# Altium PCB analogtestboard3.PCBDOC (part 2 of 3)
Units mil, origin at the board's own origin, x right, y up, seen from the top; angles counter-clockwise.
Board outline 10000 x 10000 mil, 4 copper layers (Top Layer, Internal Plane 1, Internal Plane 2, Bottom Layer); 448 components, 227 nets, 1474 pads, 451 vias.
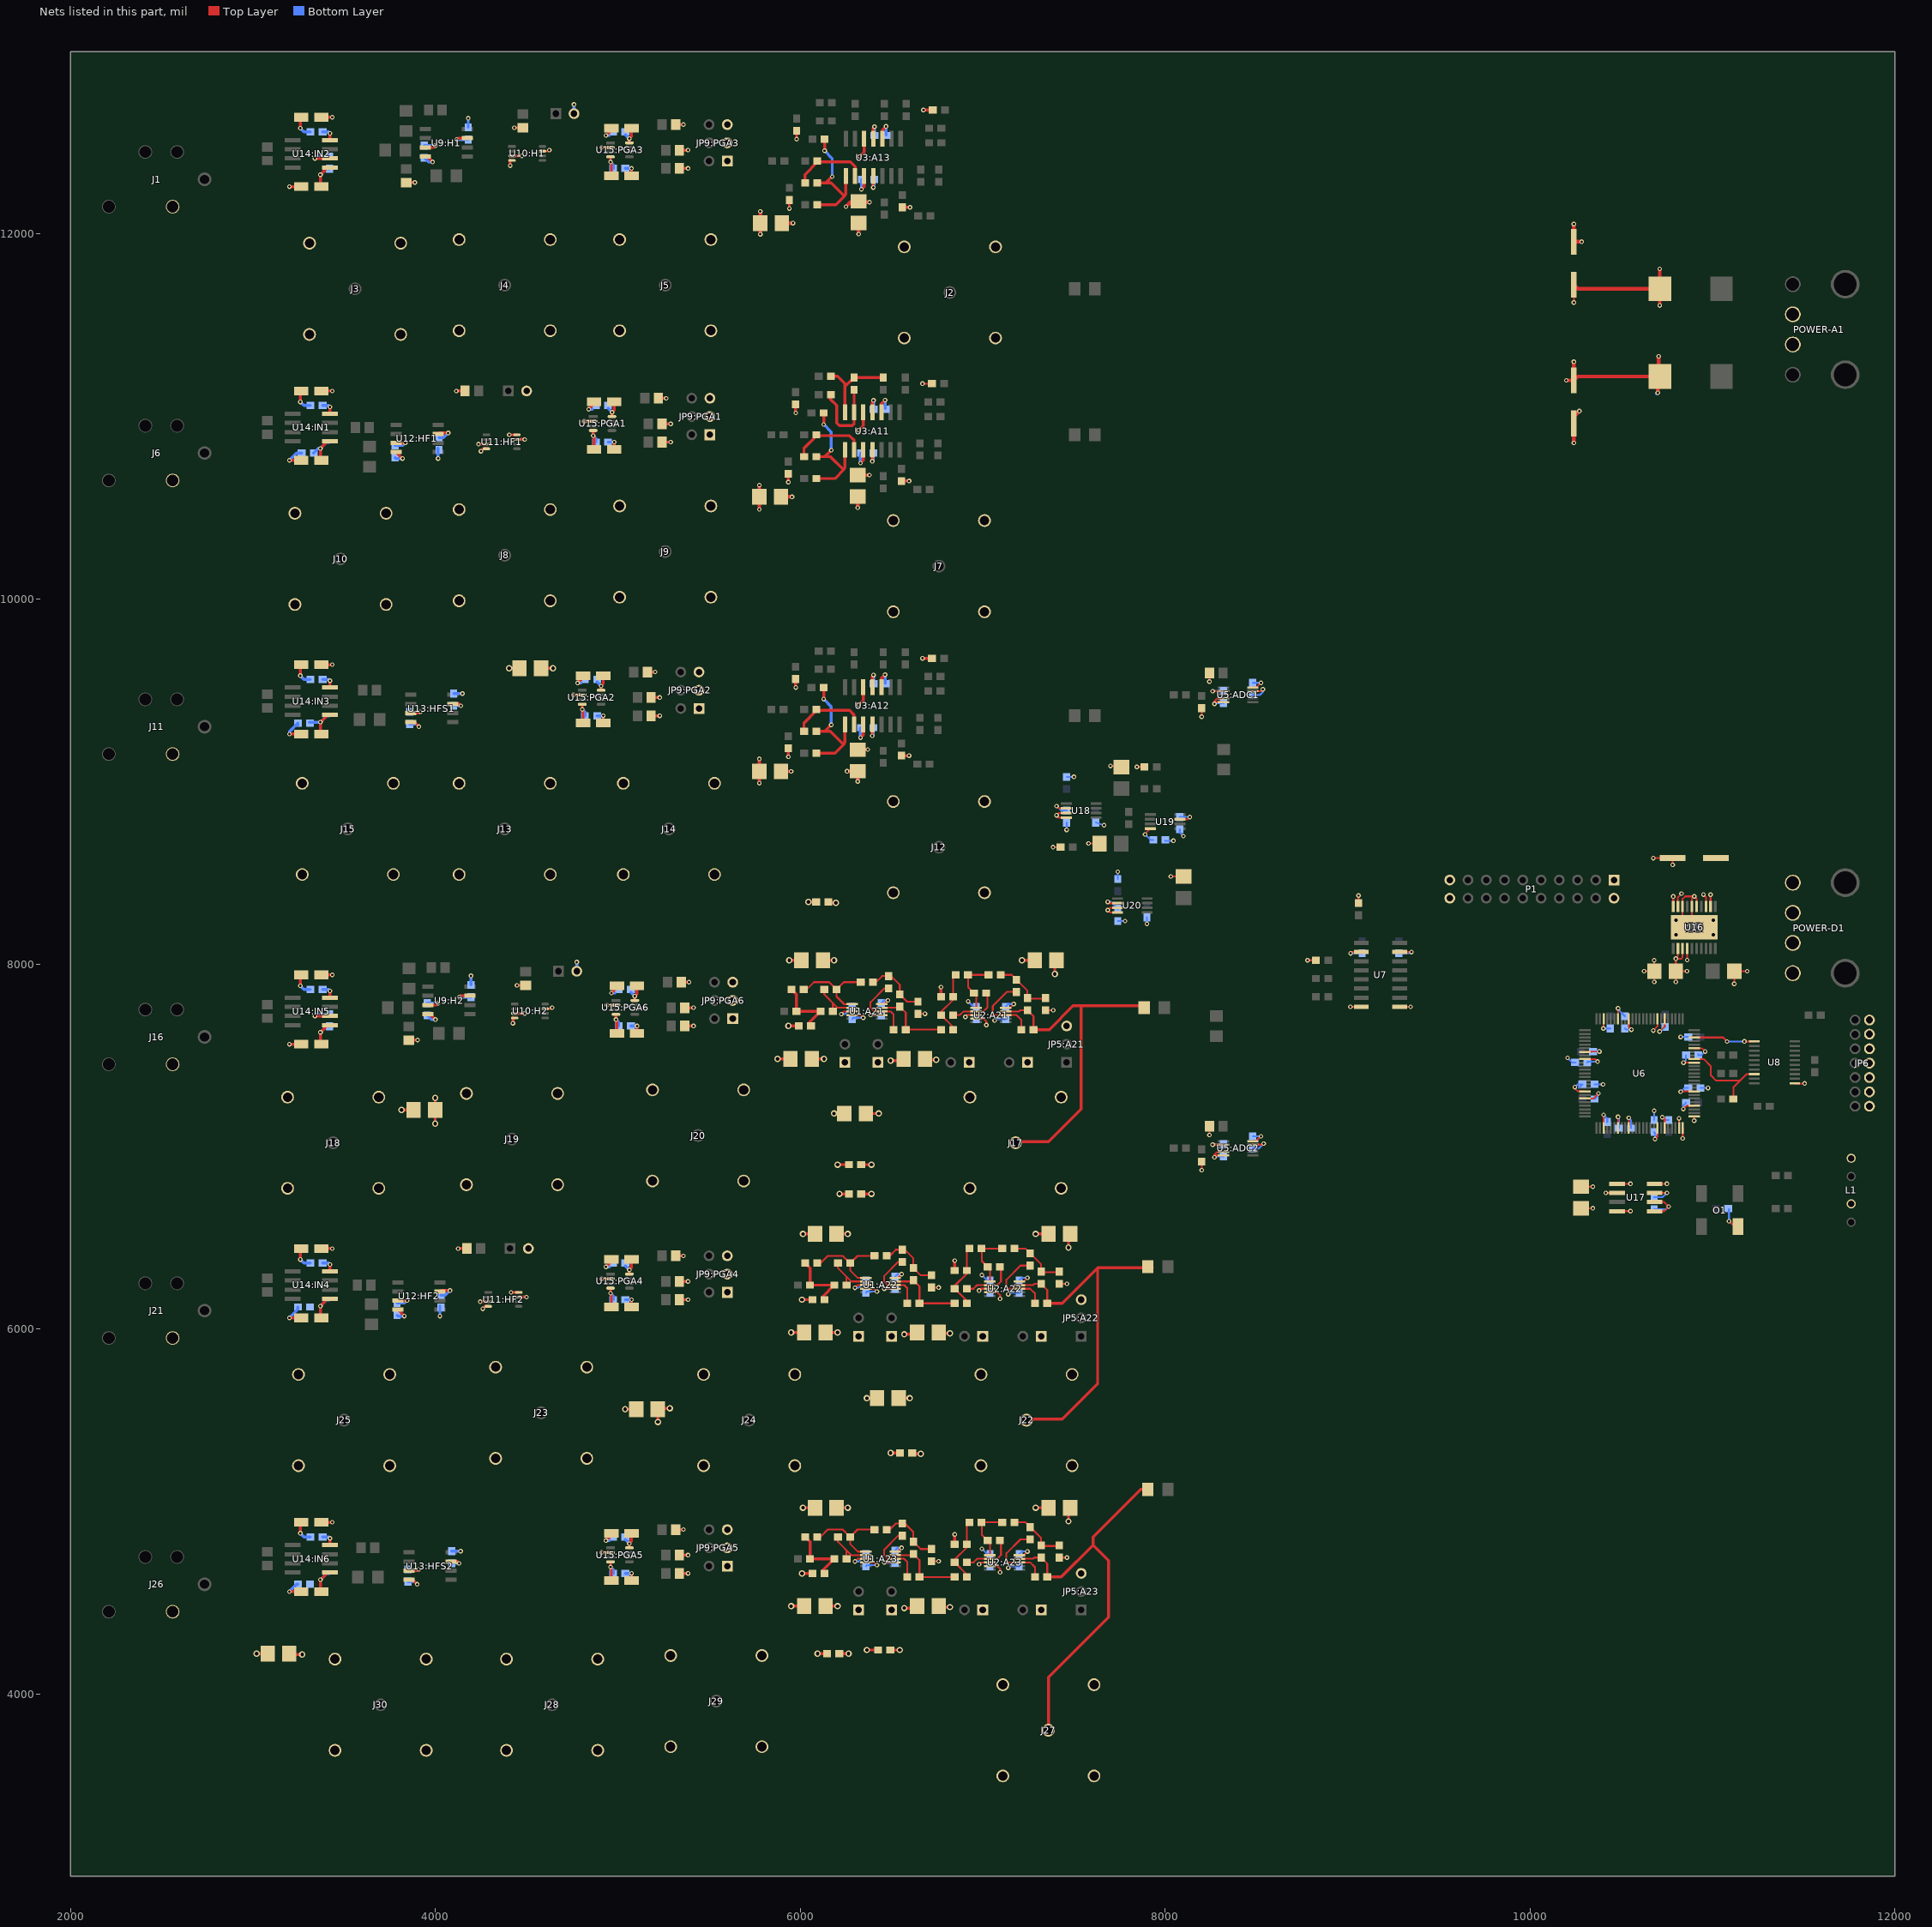
[diagram p4: the nets of this part, all layers, seen from the top]

## Footprints (in the part's own frame and the unit in brackets; to place one, negate y for a bottom-side part, rotate by r counter-clockwise, add the part's x,y. Pads: shape width x height; smd on the part's side, far side on the other; paste and mask are expansions set on the pad) (continued)
"Xilinx TQ100" [mm] "QFP; 100 Leads; Body 14 x 14 mm; Pitch 0.5 mm"
  rect 1.6x0.3 smd: 1(-7.6,6) 2(-7.6,5.5) 3(-7.6,5) 4(-7.6,4.5) 5(-7.6,4) 6(-7.6,3.5) 7(-7.6,3) 8(-7.6,2.5) 9(-7.6,2) 10(-7.6,1.5) 11(-7.6,1) 12(-7.6,0.5) 13(-7.6,0) 14(-7.6,-0.5) 15(-7.6,-1) 16(-7.6,-1.5) 17(-7.6,-2) 18(-7.6,-2.5) 19(-7.6,-3) 20(-7.6,-3.5) 21(-7.6,-4) 22(-7.6,-4.5) 23(-7.6,-5) 24(-7.6,-5.5) 25(-7.6,-6) 51(7.6,-6) 52(7.6,-5.5) 53(7.6,-5) 54(7.6,-4.5) 55(7.6,-4) 56(7.6,-3.5) 57(7.6,-3) 58(7.6,-2.5) 59(7.6,-2) 60(7.6,-1.5) 61(7.6,-1) 62(7.6,-0.5) 63(7.6,0) 64(7.6,0.5) 65(7.6,1) 66(7.6,1.5) 67(7.6,2) 68(7.6,2.5) 69(7.6,3) 70(7.6,3.5) 71(7.6,4) 72(7.6,4.5) 73(7.6,5) 74(7.6,5.5) 75(7.6,6)
  rect 0.3x1.6 smd: 26(-6,-7.6) 27(-5.5,-7.6) 28(-5,-7.6) 29(-4.5,-7.6) 30(-4,-7.6) 31(-3.5,-7.6) 32(-3,-7.6) 33(-2.5,-7.6) 34(-2,-7.6) 35(-1.5,-7.6) 36(-1,-7.6) 37(-0.5,-7.6) 38(0,-7.6) 39(0.5,-7.6) 40(1,-7.6) 41(1.5,-7.6) 42(2,-7.6) 43(2.5,-7.6) 44(3,-7.6) 45(3.5,-7.6) 46(4,-7.6) 47(4.5,-7.6) 48(5,-7.6) 49(5.5,-7.6) 50(6,-7.6) 76(6,7.6) 77(5.5,7.6) 78(5,7.6) 79(4.5,7.6) 80(4,7.6) 81(3.5,7.6) 82(3,7.6) 83(2.5,7.6) 84(2,7.6) 85(1.5,7.6) 86(1,7.6) 87(0.5,7.6) 88(0,7.6) 89(-0.5,7.6) 90(-1,7.6) 91(-1.5,7.6) 92(-2,7.6) 93(-2.5,7.6) 94(-3,7.6) 95(-3.5,7.6) 96(-4,7.6) 97(-4.5,7.6) 98(-5,7.6) 99(-5.5,7.6) 100(-6,7.6)
  silkscreen extent -7.72,-6.4 6.4,6.82

## Part data
C1:A21 C1:A22 C1:A23 C2:A21 C2:A22 C2:A23 C3:A21 C3:A22 C3:A23 C4:A21 C4:A22 C4:A23 C5:A21 C5:A22 C5:A23 C6:A21 C6:A22 C6:A23 C7:A21 C7:A22 C7:A23 C8:A21 C8:A22 C8:A23 C11:A21 C11:A22 C11:A23 C12:A21 C12:A22 C12:A23 C15:A21 C15:A22 C15:A23 C16:A21 C16:A22 C16:A23 C17:A11 C17:A12 C17:A13 C18:A11 C18:A12 C18:A13 C19:A11 C19:A12 C19:A13 C20:A11 C20:A12 C20:A13 C21:A11 C21:A12 C21:A13 C22:A11 C22:A12 C22:A13 C23:A11 C23:A12 C23:A13 C24:A11 C24:A12 C24:A13 C27:A11 C27:A12 C27:A13 C28:A11 C28:A12 C28:A13 C31:A11 C31:A12 C31:A13 C32:A11 C32:A12 C32:A13 C34:ADC1 C34:ADC2 C36:ADC1 C36:ADC2 C37 C38 C39 C40 C41 C42 C43 C44 C45 C46 C47 C48 C49 C50 C51 C52 C53 C54 C55:H1 C55:H2 C56:H1 C56:H2 C57:H1 C57:H2 C58:H1 C58:H2 C59:H1 C59:H2 C60:HF1 C60:HF2 C61:HF1 C61:HF2 C62:HF1 C62:HF2 C63:HFS1 C63:HFS2 C64:HFS1 C64:HFS2 C65:HFS1 C65:HFS2 C67:IN1 C67:IN2 C67:IN3 C67:IN4 C67:IN5 C67:IN6 C69:IN1 C69:IN2 C69:IN3 C69:IN4 C69:IN5 C69:IN6 C70:PGA1 C70:PGA2 C70:PGA3 C70:PGA4 C70:PGA5 C70:PGA6 C72:PGA1 C72:PGA2 C72:PGA3 C72:PGA4 C72:PGA5 C72:PGA6 C76 C82 C83 C84 C85 C86 C88 C90 C91 C92: "Capacitor"
C9:A21 C9:A22 C9:A23 C10:A21 C10:A22 C10:A23 C13:A21 C13:A22 C13:A23 C14:A21 C14:A22 C14:A23 C25:A11 C25:A12 C25:A13 C26:A11 C26:A12 C26:A13 C29:A11 C29:A12 C29:A13 C30:A11 C30:A12 C30:A13 C81 C87 C89: "Polarized Capacitor (Radial)"
C33:ADC1 C33:ADC2 C35:ADC1 C35:ADC2: library part Cap, "Capacitor"
C66:IN1 C66:IN2 C66:IN3 C66:IN4 C66:IN5 C66:IN6 C68:IN1 C68:IN2 C68:IN3 C68:IN4 C68:IN5 C68:IN6: "Polarized Capacitor (Surface Mount)"
C71:PGA1 C71:PGA2 C71:PGA3 C71:PGA4 C71:PGA5 C71:PGA6 C73:PGA1 C73:PGA2 C73:PGA3 C73:PGA4 C73:PGA5 C73:PGA6 C74 C77: library part Cap2, "Capacitor"
C75 C78: library part "Cap Pol1", "Polarized Capacitor (Radial)"
C79 C80: library part "Cap Pol3", "Polarized Capacitor (Surface Mount)"
J1 J6 J11 J16 J21 J26: library part XLR, "XLR balanced connector, standard"
J2 J3 J4 J5 J7 J8 J9 J10 J12 J13 J14 J15 J17 J18 J19 J20 J22 J23 J24 J25 J27 J28 J29 J30: library part VERTBNC, "Vertical BNC with correct grounding pin behavior"
JP1:A21 JP1:A22 JP1:A23 JP2:A21 JP2:A22 JP2:A23 JP3:A21 JP3:A22 JP3:A23 JP4:A21 JP4:A22 JP4:A23 JP7:H1 JP7:H2 JP8:HF1 JP8:HF2: "Header, 2-Pin"
JP5:A21 JP5:A22 JP5:A23: "Header, 3-Pin"
JP6: "Header, 7-Pin, Dual row"
JP9:PGA1 JP9:PGA2 JP9:PGA3 JP9:PGA4 JP9:PGA5 JP9:PGA6: "Header, 3-Pin, Dual row"
L2 L3: library part Inductor, "Inductor"
O1: library part SG-636PCE, "Epson CMOS/TTL Oscillator"
P1: "Header, 10-Pin, Dual row"
POWER-A1 POWER-D1: library part "Header 4", "Header, 4-Pin"
R1:A21 R1:A22 R1:A23 R2:A21 R2:A22 R2:A23 R3:A21 R3:A22 R3:A23 R4:A21 R4:A22 R4:A23 R5:A21 R5:A22 R5:A23 R6:A21 R6:A22 R6:A23 R7:A21 R7:A22 R7:A23 R8:A21 R8:A22 R8:A23 R9:A21 R9:A22 R9:A23 R10:A21 R10:A22 R10:A23 R11:A21 R11:A22 R11:A23 R12:A21 R12:A22 R12:A23 R13:A11 R13:A12 R13:A13 R14:A11 R14:A12 R14:A13 R15:A11 R15:A12 R15:A13 R16:A11 R16:A12 R16:A13 R17:A11 R17:A12 R17:A13 R18:A11 R18:A12 R18:A13 R19:A11 R19:A12 R19:A13 R20:A11 R20:A12 R20:A13 R21:A11 R21:A12 R21:A13 R22:A11 R22:A12 R22:A13 R23:A11 R23:A12 R23:A13 R24:A11 R24:A12 R24:A13 R25:ADC1 R25:ADC2 R26 R27 R28 R29 R30 R31 R36 R37 R38:H1 R38:H2 R39:H1 R39:H2 R40:H1 R40:H2 R41:HF1 R41:HF2 R42:HF1 R42:HF2 R43:HFS1 R43:HFS2 R53:PGA1 R53:PGA2 R53:PGA3 R53:PGA4 R53:PGA5 R53:PGA6 R54:PGA1 R54:PGA2 R54:PGA3 R54:PGA4 R54:PGA5 R54:PGA6 R55:PGA1 R55:PGA2 R55:PGA3 R55:PGA4 R55:PGA5 R55:PGA6: "Resistor"
R32 R33 R34 R35 R45 R46 R47 R48 R49 R50 R51 R52 R56 R57 R58: library part Res1, "Resistor"
R44:IN1 R44:IN2 R44:IN3 R44:IN4 R44:IN5 R44:IN6: library part Res1, "RR1220P-4990-D-M"
U1:A21 U1:A22 U1:A23 U2:A21 U2:A22 U2:A23: "Analog Devices Low Distortion, High Speed RRIO OA"
U3:A11 U3:A12 U3:A13: library part AD8513ARU, "low-noise JFET quad OA"
U5:ADC1 U5:ADC2: library part AD7685, "AD 16-bit 250 kSPS ADC"
U6: library part XC3S50-4VQ100C, "Xilinx Spartan-3 VQ100"
U7: "High speed digital coupler"
U8: "Xilinx Platform Flash"
U9:H1 U9:H2 U12:HF1 U12:HF2 U13:HFS1 U13:HFS2: "AD Precision Low Noise, Low Input Bias Current Operational Amplifier"
U10:H1 U10:H2 U11:HF1 U11:HF2: library part ADG619, "Low RON SPDT Switch"
U14:IN1 U14:IN2 U14:IN3 U14:IN4 U14:IN5 U14:IN6: library part AD8221, "AD8221 Precision Instrumentation Amplifier"
U15:PGA1 U15:PGA2 U15:PGA3 U15:PGA4 U15:PGA5 U15:PGA6: library part LTC6910-2, "LTI Digitally Controlled Programmabe Gain Amp"
U16: "TI dual-output low dropout voltage regulators"
U17: "Fast-transient-response 500 mA low-dropout voltage regulator"
U18 U20: library part MAX6126A21, "Ultra-High-Precision, Ultra-Low-Noise, Series Voltage Reference"
U19: library part OP1177, "Precision Low Noise, Low Input Bias Current Operational Amplifier"

## Via types
v1: diameter 25, hole 13.5, Top Layer to Bottom Layer, 398 vias
v2: diameter 35, hole 20, Top Layer to Bottom Layer, 53 vias

## Nets (pads, with @x,y where several pads share a name; then routed paths per layer and width w, separated by ;. In a path a pad name is that pad's centre, name@x,y a point inside that pad or via, vN(x,y) a via of type N, cw(c..) or ccw(c..) an arc to the next point about the centre after c; other vN are vias at no path point)
+1.2VCC: C48.1 C49.1 C50.1 C51.1 C78.1 U6.18 U6.45 U6.69 U6.93 U16.12 U16.13 U16.14 | length 875.7
  Top Layer w10: v1(10245,7325) 10245,7320 10263.43,7301.57 U6.93@10300.79,7301.57 ; U6.69@10481.89,7699.21 v1(10481.89,7756.89) ; v1(10685,7040) 10698.43,7053.43 U6.18@10698.43,7100.79 ; v1(10799.06,7900.94) v1(10799.06,8029.06) 10829.06,8029.06 10835.8,8035.8 U16.13@10835.8,8085 ; C78.1@10799.06,7960 v1(10860,7960) ; 10810.2,8040.2 U16.12@10810.2,8085 ; v1(10861.4,8021.4) U16.14@10861.4,8085 ; U6.45@10899.21,7537.8 10942.2,7537.8 v1(10960,7520)
  Bottom Layer w10: v1(10245,7325) 10260,7340 C48.1@10286.54,7340 10266.54,7320 ; v1(10481.89,7756.89) 10488.78,7750 10488.78,7744.68 C51.1@10520,7713.46 ; C50.1@10680,7078.29 10685,7073.29 v1(10685,7040) ; C49.1@10921.71,7506.71 C49.1@10921.71,7500 10940,7500 v1(10960,7520)
+2.5VCC: C52.1 C53.1 C54.1 C77.1 U6.7 U6.33 U6.58 U6.84 U17.5 U17.6 | length 653.9
  Top Layer w10: C77.1@10280,6779.06 v1(10344.06,6779.06) ; U6.84@10300.79,7478.74 10356.26,7478.74 v1(10370,7465) ; v1(10415,6745) U17.6@10477.64,6745 ; U17.5@10477.64,6795 v1(10550,6795) ; U6.7@10481.89,7100.79 v1(10481.89,7161.89) ; v1(10675,7635) 10698.43,7658.43 U6.58@10698.43,7699.21 ; v1@10826.57,7301.57 U6.33@10899.21,7301.57
  Bottom Layer w10: C52.1@10313.46,7460 10318.46,7465 v1(10370,7465) ; v1(10481.89,7161.89) 10486.54,7157.24 C53.1@10486.54,7100 ; v1(10825,7300) 10845,7320 C54.1@10866.54,7320
+5VCC: C74.1 C76.1 POWER-D1.4 U16.2 U16.3 U16.9 U16.10 U17.3 U17.4 | length 482.8
  Top Layer w10: U17.3@10682.36,6745 v1(10750,6745) ; U17.4@10682.36,6795 v1(10750,6795) ; U16.10@10784.6,8315 v1(10784.6,8369.6) ; U16.9@10810.2,8315 10810.2,8365.2 v1(10830,8385) ; v1(10950,8380) 10963.8,8366.2 U16.3@10963.8,8315 ; U16.2@10989.4,8315 v1(10989.4,8379.4)
  Bottom Layer w10: C76.1@10680,6721.71 10726.71,6721.71 v1(10750,6745)
AGND: C5:A21.1 C5:A22.1 C5:A23.1 C6:A21.1 C6:A22.1 C6:A23.1 C7:A21.1 C7:A22.1 C7:A23.1 C8:A21.1 C8:A22.1 C8:A23.1 C9:A21.2 C9:A22.2 C9:A23.2 C10:A21.2 C10:A22.2 C10:A23.2 C11:A21.1 C11:A22.1 C11:A23.1 C12:A21.1 C12:A22.1 C12:A23.1 C13:A21.1 C13:A22.1 C13:A23.1 C14:A21.1 C14:A22.1 C14:A23.1 C15:A21.2 C15:A22.2 C15:A23.2 C16:A21.2 C16:A22.2 C16:A23.2 C21:A11.1 C21:A12.1 C21:A13.1 C22:A11.1 C22:A12.1 C22:A13.1 C23:A11.1 C23:A12.1 C23:A13.1 C24:A11.1 C24:A12.1 C24:A13.1 C25:A11.2 C25:A12.2 C25:A13.2 C26:A11.2 C26:A12.2 C26:A13.2 C27:A11.1 C27:A12.1 C27:A13.1 C28:A11.1 C28:A12.1 C28:A13.1 C29:A11.1 C29:A12.1 C29:A13.1 C30:A11.1 C30:A12.1 C30:A13.1 C31:A11.2 C31:A12.2 C31:A13.2 C32:A11.2 C32:A12.2 C32:A13.2 C33:ADC1.1 C33:ADC2.1 C34:ADC1.2 C34:ADC2.2 C35:ADC1.1 C35:ADC2.1 C36:ADC1.1 C36:ADC2.1 C37.1 C56:H1.2 C56:H2.2 C59:H1.2 C59:H2.2 C61:HF1.1 C61:HF2.1 C62:HF1.1 C62:HF2.1 C64:HFS1.1 C64:HFS2.1 C65:HFS1.1 C65:HFS2.1 C66:IN1.2 C66:IN2.2 C66:IN3.2 C66:IN4.2 C66:IN5.2 C66:IN6.2 C67:IN1.2 C67:IN2.2 C67:IN3.2 C67:IN4.2 C67:IN5.2 C67:IN6.2 C68:IN1.1 C68:IN2.1 C68:IN3.1 C68:IN4.1 C68:IN5.1 C68:IN6.1 C69:IN1.2 C69:IN2.2 C69:IN3.2 C69:IN4.2 C69:IN5.2 C69:IN6.2 C70:PGA1.2 C70:PGA2.2 C70:PGA3.2 C70:PGA4.2 C70:PGA5.2 C70:PGA6.2 C71:PGA1.2 C71:PGA2.2 C71:PGA3.2 C71:PGA4.2 C71:PGA5.2 C71:PGA6.2 C72:PGA1.1 C72:PGA2.1 C72:PGA3.1 C72:PGA4.1 C72:PGA5.1 C72:PGA6.1 C73:PGA1.1 C73:PGA2.1 C73:PGA3.1 C73:PGA4.1 C73:PGA5.1 C73:PGA6.1 C79.2 C80.1 C81.2 C82.2 C83.2 C84.1 C85.2 C86.1 C87.2 C88.2 C89.2 C90.2 C91.2 C92.2 J1.1 J2.2 J2.3 J2.4 J2.5 J3.2 J3.3 J3.4 J3.5 J4.2 J4.3 J4.4 J4.5 J5.2 J5.3 J5.4 J5.5 J6.1 J7.2 J7.3 J7.4 J7.5 J8.2 J8.3 J8.4 J8.5 J9.2 J9.3 J9.4 J9.5 J10.2 J10.3 J10.4 J10.5 J11.1 J12.2 J12.3 J12.4 J12.5 J13.2 J13.3 J13.4 J13.5 J14.2 J14.3 J14.4 J14.5 J15.2 J15.3 J15.4 J15.5 J16.1 J17.2 J17.3 J17.4 J17.5 J18.2 J18.3 J18.4 J18.5 J19.2 J19.3 J19.4 J19.5 J20.2 J20.3 J20.4 J20.5 J21.1 J22.2 J22.3 J22.4 J22.5 J23.2 J23.3 J23.4 J23.5 J24.2 J24.3 J24.4 J24.5 J25.2 J25.3 J25.4 J25.5 J26.1 J27.2 J27.3 J27.4 J27.5 J28.2 J28.3 J28.4 J28.5 J29.2 J29.3 J29.4 J29.5 J30.2 J30.3 J30.4 J30.5 JP5:A21.3 JP5:A22.3 JP5:A23.3 JP9:PGA1.1 JP9:PGA1.3 JP9:PGA1.5 JP9:PGA2.1 JP9:PGA2.3 JP9:PGA2.5 JP9:PGA3.1 JP9:PGA3.3 JP9:PGA3.5 JP9:PGA4.1 JP9:PGA4.3 JP9:PGA4.5 JP9:PGA5.1 JP9:PGA5.3 JP9:PGA5.5 JP9:PGA6.1 JP9:PGA6.3 JP9:PGA6.5 POWER-A1.2 POWER-A1.3 R27.1 R39:H1.1 R39:H2.1 R40:H1.1 R40:H2.1 R42:HF1.1 R42:HF2.1 R58.1 U1:A21.3 U1:A21.7 U1:A22.3 U1:A22.7 U1:A23.3 U1:A23.7 U2:A21.3 U2:A22.3 U2:A23.3 U3:A11.3 U3:A11.10 U3:A11.12 U3:A12.3 U3:A12.10 U3:A12.12 U3:A13.3 U3:A13.10 U3:A13.12 U5:ADC1.4 U5:ADC1.5 U5:ADC1.9 U5:ADC2.4 U5:ADC2.5 U5:ADC2.9 U7.2 U7.8 U9:H1.3 U9:H2.3 U10:H1.3 U10:H2.3 U11:HF1.3 U11:HF1.8 U11:HF2.3 U11:HF2.8 U12:HF1.3 U12:HF2.3 U13:HFS1.3 U13:HFS2.3 U14:IN2.6 U14:IN5.6 U15:PGA1.2 U15:PGA2.2 U15:PGA3.2 U15:PGA4.2 U15:PGA5.2 U15:PGA6.2 U18.3 U18.4 U20.3 U20.4 | length 12133.9
  Top Layer w10: v1(6225,7725) 6240,7740 U1:A21.3@6284.29,7740 ; v1(6300,4725) 6315,4740 U1:A23.3@6359.29,4740 ; v1(6300,6225) 6315,6240 U1:A22.3@6359.29,6240 ; v1(6385.31,7720.31) U1:A21.7@6445.71,7720.31 ; v1(6460.31,4720.31) U1:A23.7@6520.71,4720.31 ; v1(6460.31,6220.31) U1:A22.7@6520.71,6220.31 ; C6:A21.1@6645,7726.54 v1(6683.46,7726.54) ; v1(6670,11180) C23:A11.1@6721.54,11180 ; C6:A23.1@6720,4726.54 v1(6758.46,4726.54) ; C6:A22.1@6720,6226.54 v1(6758.46,6226.54) ; v1(6905,7710) 6915,7720 U2:A21.3@6964.29,7720 ; v1(6980,4710) 6990,4720 U2:A23.3@7039.29,4720 ; v1(6980,6210) 6990,6220 U2:A22.3@7039.29,6220 ; C8:A21.1@7345,7746.54 v1(7386.54,7746.54) ; v1(7385,8640) C88.2@7426.54,8640 ; C8:A23.1@7420,4746.54 v1(7461.54,4746.54) ; C8:A22.1@7420,6246.54 v1(7461.54,6246.54) ; U18.4@7458.31,8801.61 7418.39,8801.61 v1(7405,8815) 7417.2,8827.2 U18.3@7458.31,8827.2 ; v1(7580,8660) C87.2@7640.94,8660 ; v1(7700,9085) C81.2@7760,9085 ; U20.4@7738.31,8281.61 7698.39,8281.61 v1(7685,8295) 7697.2,8307.2 U20.3@7738.31,8307.2 ; v1(7845,9080) R58.1@7886.54,9080 ; v1(8030.94,8479.06) C89.2@8100,8479.06 ; v1(8200,6870) C36:ADC2.1@8200,6916.54 ; v1(8200,9355) C36:ADC1.1@8200,9401.54 ; v1(8242.6,7062.4) C33:ADC2.1@8242.6,7110 ; v1(8242.6,9547.4) C33:ADC1.1@8242.6,9595 ; v1(8270,6940) 8270,6955 8285.31,6970.31 U5:ADC2.4@8319.29,6970.31 ; v1(8270,9425) 8270,9440 8285.31,9455.31 U5:ADC1.4@8319.29,9455.31 ; v1@8270.63,6950.63 U5:ADC2.5@8319.29,6950.63 ; v1@8270.63,9435.63 U5:ADC1.5@8319.29,9435.63 ; U5:ADC2.9@8480.71,7009.68 8534.68,7009.68 v1(8540,7015) ; U5:ADC1.9@8480.71,9494.68 8524.68,9494.68 v1(8535,9505) ; v1(8780,8020) R27.1@8826.54,8020 ; v1(9015,7765) U7.8@9074.68,7765 ; v1@9023.43,8065 U7.2@9074.68,8065
  Top Layer w16: v2(3020,4220) C26:A11.2@3080.94,4220 ; v1(3200,4560) C68:IN6.1@3264.88,4560 ; v1(3200,6060) C68:IN4.1@3264.88,6060 ; v1(3200,7560) C68:IN5.1@3264.88,7560 ; v1(3200,9260) C68:IN3.1@3264.88,9260 ; v1(3200,10760) C68:IN1.1@3264.88,10760 ; v1(3200,12260) C68:IN2.1@3264.88,12260 ; v1(3260,4880) C66:IN6.2@3260,4935.12 ; v1(3260,6380) C66:IN4.2@3260,6435.12 ; v1(3260,7880) C66:IN5.2@3260,7935.12 ; v1(3260,9580) C66:IN3.2@3260,9635.12 ; v1(3260,11080) C66:IN1.2@3260,11135.12 ; v1(3260,12580) C66:IN2.2@3260,12635.12 ; v1(3340,7715) U14:IN5.6@3422.36,7715 ; v1(3340,12415) U14:IN2.6@3422.36,12415 ; U12:HF1.3@3784.84,10855 v1(3835,10855) ; U12:HF2.3@3794.84,6155 v1(3845,6155) ; v2(3815,7200) C29:A11.1@3880.94,7200 ; R39:H1.1@3840,12282.6 v1(3887.6,12282.6) ; U13:HFS2.3@3854.84,4675 3901.57,4675 v1(3908.29,4681.71) ; R39:H2.1@3855,7582.6 v1(3902.6,7582.6) ; U13:HFS1.3@3864.84,9375 3911.57,9375 v1(3918.29,9381.71) ; U9:H1.3@3944.84,12475 3989.57,12475 v1(3999.79,12485.21) ; U9:H2.3@3959.84,7775 4004.57,7775 v1(4014.79,7785.21) ; v1(4115,11140) R42:HF1.1@4162.6,11140 ; v1(4125,6440) R42:HF2.1@4172.6,6440 ; v1@4237.36,10850 U11:HF1.3@4280,10850 ; v1@4247.36,6150 U11:HF2.3@4290,6150 ; v2(4405,9620) C29:A12.1@4460.94,9620 ; v1(4405,10900) U11:HF1.8@4446.93,10900 ; v1(4415,6200) U11:HF2.8@4456.93,6200 ; U10:H1.3@4420,12428.82 v1(4473.82,12428.82) ; v1(4432.4,12582.6) R40:H1.1@4480,12582.6 ; U10:H2.3@4435,7728.82 v1(4488.82,7728.82) ; v1(4447.4,7882.6) R40:H2.1@4495,7882.6 ; v1(4755.59,9474.41) U15:PGA2.2@4805,9474.41 ; v1(4780,9540) 4809.88,9569.88 C71:PGA2.2@4809.88,9580 ; v1(4815.59,10974.41) U15:PGA1.2@4865,10974.41 ; v1(4840,11040) 4869.88,11069.88 C71:PGA1.2@4869.88,11080 ; v1(4910.59,4774.41) U15:PGA5.2@4960,4774.41 ; v1(4910.59,6274.41) U15:PGA4.2@4960,6274.41 ; v1(4910.59,12474.41) U15:PGA3.2@4960,12474.41 ; C73:PGA2.1@4920.12,9320 v1(4920.12,9360.12) ; v1(4935,4840) 4964.88,4869.88 C71:PGA5.2@4964.88,4880 ; v1(4935,6340) 4964.88,6369.88 C71:PGA4.2@4964.88,6380 ; v1(4935,12540) 4964.88,12569.88 C71:PGA3.2@4964.88,12580 ; v1(4940.59,7774.41) U15:PGA6.2@4990,7774.41 ; v1(4965,7840) 4994.88,7869.88 C71:PGA6.2@4994.88,7880 ; C73:PGA1.1@4980.12,10820 v1(4980.12,10860.12) ; C73:PGA5.1@5075.12,4620 v1(5075.12,4660.12) ; C73:PGA4.1@5075.12,6120 v1(5075.12,6160.12) ; C73:PGA3.1@5075.12,12320 v1(5075.12,12360.12) ; C73:PGA6.1@5105.12,7620 v1(5105.12,7660.12) ; v2(5220,5490) C26:A12.2@5220,5560 ; C26:A12.2@5225,5565 v2(5285,5565) ; v2(5935,7660) C5:A21.1@5991.54,7660 ; v1(5935,9135) C21:A12.1@5935,9181.54 ; v1(5935,10640) C21:A11.1@5935,10686.54 ; v1(5940,12140) C21:A13.1@5940,12186.54 ; v1(5975,9515) C22:A12.1@5975,9561.54 ; v1(5975,11020) C22:A11.1@5975,11066.54 ; v1(5980,12520) C22:A13.1@5980,12566.54 ; v2(6010,4660) C5:A23.1@6066.54,4660 ; v2(6010,6160) C5:A22.1@6066.54,6160 ; v2(6045,8340) C28:A11.1@6086.54,8340 ; C9:A21.2@6064.06,7480 v2(6130,7480) ; v2(6095,4220) C28:A12.1@6146.54,4220 ; C13:A21.1@6124.06,8020 v2(6185,8020) ; C9:A23.2@6139.06,4480 v2(6205,4480) ; C9:A22.2@6139.06,5980 v2(6205,5980) ; v2(6185,7180) C29:A13.1@6240.94,7180 ; C13:A23.1@6199.06,5020 v2(6260,5020) ; C13:A22.1@6199.06,6520 v2(6260,6520) ; v2(6205,6900) C28:A13.1@6266.54,6900 ; v1(6320,9420) 6345,9445 U3:A12.12@6345,9517.36 ; v1(6320,10925) 6345,10950 U3:A11.12@6345,11022.36 ; v1(6325,12425) 6350,12450 U3:A13.12@6350,12522.36 ; v1(6330,9240) 6345,9255 U3:A12.3@6345,9312.64 ; v1(6330,10745) 6345,10760 U3:A11.3@6345,10817.64 ; C32:A13.2@6333.46,6740 v2(6390,6740) ; v1(6335,12245) 6350,12260 U3:A13.3@6350,12317.64 ; U3:A12.10@6445,9517.36 6445,9565 v1(6465,9585) ; U3:A11.10@6445,11022.36 6445,11070 v1(6465,11090) ; U3:A13.10@6450,12522.36 6450,12570 v1(6470,12590) ; C32:A12.2@6493.46,4240 v2(6545,4240) ; v2(6495,7470) C14:A21.1@6560,7470 ; C26:A13.2@6535,5620 v2(6600,5620) ; C24:A12.1@6555,9141.54 v1(6596.54,9141.54) ; C24:A11.1@6555,10646.54 v1(6596.54,10646.54) ; C24:A13.1@6560,12146.54 v1(6601.54,12146.54) ; v2(6570,4470) C14:A23.1@6635,4470 ; v2(6570,5970) C14:A22.1@6635,5970 ; C32:A11.2@6615,5315 v2(6660,5315) ; v1(6670,9675) C23:A12.1@6721.54,9675 ; v1(6675,12680) C23:A13.1@6726.54,12680 ; C7:A21.1@6771.54,7820 v1(6771.54,7873.46) ; C7:A23.1@6846.54,4820 v1(6846.54,4873.46) ; C7:A22.1@6846.54,6320 v1(6846.54,6373.46) ; v2(7395,7945) C10:A21.2@7395,8020 ; v2(7470,4945) C10:A23.2@7470,5020 ; v2(7470,6445) C10:A22.2@7470,6520
  Top Layer w20: C25:A11.2@5894.06,10560 v1(5955,10560) ; C25:A13.2@5899.06,12060 v1(5960,12060) ; C25:A12.2@5900,9055 v1(5950,9055) ; v1(6255.94,9055.94) C30:A12.1@6315,9055.94 v1(6315,9000) ; v1(6315,10500) C30:A11.1@6315,10560.94 ; v1(6320,12000) C30:A13.1@6320,12055 ; v1(10240,10855) 10240,11000 v1(10270,11030) ; v1(10240,12055) C80.1@10240,11958.11 v1(10283.11,11958.11)
  Bottom Layer w10: v1(6225,7725) 6244.79,7725 C15:A21.2@6285,7765.21 ; v1(6300,4725) 6319.79,4725 C15:A23.2@6360,4765.21 ; v1(6300,6225) 6319.79,6225 C15:A22.2@6360,6265.21 ; v1(6385.31,7720.31) 6387.34,7718.29 C11:A21.1@6445,7718.29 ; v1(6460.31,4720.31) 6462.34,4718.29 C11:A23.1@6520,4718.29 ; v1(6460.31,6220.31) 6462.34,6218.29 C11:A22.1@6520,6218.29 ; v1(6920,7795) 6949.79,7765.21 C16:A21.2@6965,7765.21 ; v1(6995,4795) 7024.79,4765.21 C16:A23.2@7040,4765.21 ; v1(6995,6295) 7024.79,6265.21 C16:A22.2@7040,6265.21 ; v1(7065,7690) 7073.29,7698.29 C12:A21.1@7125,7698.29 ; v1(7140,4690) 7148.29,4698.29 C12:A23.1@7200,4698.29 ; v1(7140,6190) 7148.29,6198.29 C12:A22.1@7200,6198.29 ; v1(7460,8735) C82.2@7460,8774.79 ; C85.2@7460,9025.21 v1(7499.79,9025.21) ; C83.2@7620,8774.79 v1(7665,8760) ; C90.2@7740,8234.79 v1(7779.79,8234.79) ; C92.2@7740,8465.21 v1(7740,8505) ; v1(7900,8220) C91.2@7900,8254.79 ; C86.1@8000,8675 v1(8045,8675) ; C84.1@8080,8738.29 8080,8720 v1(8100,8700) ; v1@8274.79,6944.79 C34:ADC2.2@8320,6944.79 ; v1@8274.79,9429.79 C34:ADC1.2@8320,9429.79 ; C35:ADC2.1@8480,6988.28 8513.28,6988.28 v1(8540,7015) ; C35:ADC1.1@8480,9473.28 8518.28,9473.28 8535,9490 v1(8535,9505) ; v1(9016.71,8058.29) C37.1@9080,8058.29
  Bottom Layer w16: v1(3200,4560) 3240,4600 C69:IN6.2@3246.54,4600 ; v1(3200,6060) 3246.54,6106.54 C69:IN4.2@3246.54,6120 ; v1(3200,9260) 3200,9273.46 C69:IN3.2@3246.54,9320 C69:IN3.2@3246.54,9306.54 ; v1(3200,10760) 3240,10800 C69:IN1.2@3266.54,10800 ; v1(3260,4880) 3280,4860 C67:IN6.2@3314.79,4860 ; v1(3260,6380) 3280,6360 C67:IN4.2@3314.79,6360 ; v1(3260,7880) 3280,7860 C67:IN5.2@3314.79,7860 ; v1(3260,9580) 3280,9560 C67:IN3.2@3314.79,9560 ; v1(3260,11080) 3280,11060 C67:IN1.2@3314.79,11060 ; v1(3260,12580) 3280,12560 C67:IN2.2@3314.79,12560 ; 3350.21,7725.21 C69:IN5.2@3420,7725.21 ; 3350.21,12425.21 C69:IN2.2@3420,12425.21 ; C62:HF1.1@3780,10841.72 3821.72,10841.72 v1(3835,10855) ; C62:HF2.1@3790,6141.72 3831.72,6141.72 v1(3845,6155) ; C65:HFS2.1@3850,4681.71 v1(3908.29,4681.71) ; C65:HFS1.1@3860,9381.71 v1(3918.29,9381.71) ; C59:H1.2@3940,12485.21 v1(3999.79,12485.21) ; C59:H2.2@3955,7785.21 v1(4014.79,7785.21) ; v1(4015,10770) C61:HF1.1@4015,10825 ; v1(4025,6070) C61:HF2.1@4025,6125 ; C64:HFS2.1@4090,4781.71 v1(4138.29,4781.71) ; C64:HFS1.1@4100,9481.71 v1(4148.29,9481.71) ; C56:H1.2@4180,12585.21 v1(4180,12635) ; C56:H2.2@4195,7885.21 v1(4195,7935) ; v1(4780,9540) 4799.79,9540 ; v1(4840,11040) 4859.79,11040 ; C72:PGA2.1@4886.72,9360 4920,9360 v1(4920.12,9360.12) ; v1(4935,4840) 4954.79,4840 ; v1(4935,6340) 4954.79,6340 ; v1(4935,12540) 4954.79,12540 ; C72:PGA1.1@4946.72,10860 4980,10860 v1(4980.12,10860.12) ; v1(4965,7840) 4984.79,7840 ; C72:PGA5.1@5041.72,4660 5075,4660 v1(5075.12,4660.12) ; C72:PGA4.1@5041.72,6160 5075,6160 v1(5075.12,6160.12) ; C72:PGA3.1@5041.72,12360 5075,12360 v1(5075.12,12360.12) ; C72:PGA6.1@5071.72,7660 5105,7660 v1(5105.12,7660.12) ; v1(6330,9240) 6330,9291.72 C27:A12.1@6333.29,9295 ; v1(6330,10745) 6330,10796.72 C27:A11.1@6333.29,10800 ; v1(6335,12245) 6335,12296.72 C27:A13.1@6338.28,12300 ; C31:A12.2@6465,9538.46 v1(6465,9585) ; C31:A11.2@6465,11043.46 v1(6465,11090) ; C31:A13.2@6470,12543.46 v1(6470,12590)
  other v1: 4246.18,6148.82 4236.18,10848.82
AVDD: C9:A21.1 C9:A22.1 C9:A23.1 C10:A21.1 C10:A22.1 C10:A23.1 C11:A21.2 C11:A22.2 C11:A23.2 C12:A21.2 C12:A22.2 C12:A23.2 C25:A11.1 C25:A12.1 C25:A13.1 C26:A11.1 C26:A12.1 C26:A13.1 C27:A11.2 C27:A12.2 C27:A13.2 C28:A11.2 C28:A12.2 C28:A13.2 C34:ADC1.1 C34:ADC2.1 C35:ADC1.2 C35:ADC2.2 C56:H1.1 C56:H2.1 C61:HF1.2 C61:HF2.2 C64:HFS1.2 C64:HFS2.2 C66:IN1.1 C66:IN2.1 C66:IN3.1 C66:IN4.1 C66:IN5.1 C66:IN6.1 C67:IN1.1 C67:IN2.1 C67:IN3.1 C67:IN4.1 C67:IN5.1 C67:IN6.1 C70:PGA1.1 C70:PGA2.1 C70:PGA3.1 C70:PGA4.1 C70:PGA5.1 C70:PGA6.1 C71:PGA1.1 C71:PGA2.1 C71:PGA3.1 C71:PGA4.1 C71:PGA5.1 C71:PGA6.1 C79.1 C82.1 C84.2 C90.1 JP1:A21.1 JP1:A22.1 JP1:A23.1 JP2:A21.1 JP2:A22.1 JP2:A23.1 JP3:A21.1 JP3:A22.1 JP3:A23.1 JP4:A21.1 JP4:A22.1 JP4:A23.1 JP7:H1.2 JP7:H2.2 JP8:HF1.2 JP8:HF2.2 L2.2 R26.2 R53:PGA1.2 R53:PGA2.2 R53:PGA3.2 R53:PGA4.2 R53:PGA5.2 R53:PGA6.2 R54:PGA1.2 R54:PGA2.2 R54:PGA3.2 R54:PGA4.2 R54:PGA5.2 R54:PGA6.2 R55:PGA1.2 R55:PGA2.2 R55:PGA3.2 R55:PGA4.2 R55:PGA5.2 R55:PGA6.2 U1:A21.10 U1:A22.10 U1:A23.10 U2:A21.10 U2:A22.10 U2:A23.10 U3:A11.4 U3:A12.4 U3:A13.4 U5:ADC1.2 U5:ADC1.10 U5:ADC2.2 U5:ADC2.10 U9:H1.7 U9:H2.7 U10:H1.4 U10:H2.4 U11:HF1.4 U11:HF2.4 U12:HF1.7 U12:HF2.7 U13:HFS1.7 U13:HFS2.7 U14:IN1.8 U14:IN2.8 U14:IN3.8 U14:IN4.8 U14:IN5.8 U14:IN6.8 U15:PGA1.8 U15:PGA2.8 U15:PGA3.8 U15:PGA4.8 U15:PGA5.8 U15:PGA6.8 U18.2 U19.7 U20.2 | length 6892.5
  Top Layer w10: U1:A21.10@6445.71,7779.37 6459.37,7779.37 v1(6480,7800) ; U1:A23.10@6520.71,4779.37 6534.37,4779.37 v1(6555,4800) ; U1:A22.10@6520.71,6279.37 6534.37,6279.37 v1(6555,6300) ; U2:A21.10@7125.71,7759.37 7149.37,7759.37 v1(7170,7780) ; U2:A23.10@7200.71,4759.37 7224.37,4759.37 v1(7245,4780) ; U2:A22.10@7200.71,6259.37 7224.37,6259.37 v1(7245,6280) ; v1(7405,8865) 7417.21,8852.79 U18.2@7458.31,8852.79 ; v1(7685,8340) 7692.21,8332.79 U20.2@7738.31,8332.79 ; U19.7@8081.69,8792.8 8122.8,8792.8 v1(8135,8805) ; v1(8260.32,7009.68) U5:ADC2.2@8319.29,7009.68 ; v1(8260.32,9494.68) U5:ADC1.2@8319.29,9494.68 ; U5:ADC2.10@8480.71,7029.37 8498.94,7029.37 v1(8524.79,7055.21) ; U5:ADC1.10@8480.71,9514.37 8498.94,9514.37 v1(8524.79,9540.21) ; R26.2@9060,8333.46 v1(9060,8375)
  Top Layer w16: C26:A11.1@3205,4215 v2(3270,4215) ; C66:IN6.1@3370,4940 v1(3435,4940) ; C66:IN4.1@3370,6440 v1(3435,6440) ; C66:IN5.1@3370,7940 v1(3435,7940) ; C66:IN3.1@3370,9640 v1(3435,9640) ; C66:IN1.1@3370,11140 v1(3435,11140) ; C66:IN2.1@3370,12640 v1(3435,12640) ; U14:IN6.8@3422.36,4815 v1(3422.36,4852.36) ; U14:IN4.8@3422.36,6315 v1(3422.36,6352.36) ; U14:IN5.8@3422.36,7815 v1(3422.36,7852.36) ; U14:IN3.8@3422.36,9515 v1(3422.36,9552.36) ; U14:IN1.8@3422.36,11015 v1(3422.36,11052.36) ; U14:IN2.8@3422.36,12515 v1(3422.36,12552.36) ; U12:HF1.7@4015.16,10905 4020.16,10910 v1(4070,10910) ; U12:HF2.7@4025.16,6205 4030.16,6210 v1(4080,6210) ; U13:HFS2.7@4085.16,4725 4119.57,4725 v1(4129.79,4714.79) ; U13:HFS1.7@4095.16,9425 4129.57,9425 v1(4139.79,9414.79) ; v1(4116.72,12518.28) 4123.43,12525 U9:H1.7@4175.16,12525 ; v1(4131.72,7818.28) 4138.43,7825 U9:H2.7@4190.16,7825 ; v1(4250,10810) 4263.23,10823.23 U11:HF1.4@4280,10823.23 ; v1(4260,6110) 4273.23,6123.23 U11:HF2.4@4290,6123.23 ; v1(4410,12375) U10:H1.4@4410,12405 ; v1(4425,7675) U10:H2.4@4425,7705 ; U15:PGA2.8@4908.15,9500 v1(4908.15,9523.15) ; 4920.12,9535.12 C71:PGA2.1@4920.12,9580 ; U15:PGA1.8@4968.15,11000 v1(4968.15,11023.15) ; 4980.12,11035.12 C71:PGA1.1@4980.12,11080 ; v2(5040,5560) C26:A12.1@5100.94,5560 ; U15:PGA5.8@5063.15,4800 v1(5063.15,4823.15) ; U15:PGA4.8@5063.15,6300 v1(5063.15,6323.15) ; U15:PGA3.8@5063.15,12500 v1(5063.15,12523.15) ; 5075.12,4835.12 C71:PGA5.1@5075.12,4880 ; 5075.12,6335.12 C71:PGA4.1@5075.12,6380 ; 5075.12,12535.12 C71:PGA3.1@5075.12,12580 ; U15:PGA6.8@5093.15,7800 v1(5093.15,7823.15) ; 5105.12,7835.12 C71:PGA6.1@5105.12,7880 ; R55:PGA2.2@5162.4,9600 v1(5205,9600) ; R53:PGA2.2@5182.4,9360 v1(5230,9360) ; R54:PGA2.2@5182.4,9460 v1(5230,9460) ; R55:PGA1.2@5222.4,11100 v1(5265,11100) ; R53:PGA1.2@5242.4,10860 v1(5290,10860) ; R54:PGA1.2@5242.4,10960 v1(5290,10960) ; R55:PGA5.2@5317.4,4900 v1(5360,4900) ; R55:PGA4.2@5317.4,6400 v1(5360,6400) ; R55:PGA3.2@5317.4,12600 v1(5360,12600) ; R53:PGA5.2@5337.4,4660 v1(5385,4660) ; R54:PGA5.2@5337.4,4760 v1(5385,4760) ; R53:PGA4.2@5337.4,6160 v1(5385,6160) ; R54:PGA4.2@5337.4,6260 v1(5385,6260) ; R53:PGA3.2@5337.4,12360 v1(5385,12360) ; R54:PGA3.2@5337.4,12460 v1(5385,12460) ; R55:PGA6.2@5347.4,7900 v1(5390,7900) ; R53:PGA6.2@5367.4,7660 v1(5415,7660) ; R54:PGA6.2@5367.4,7760 v1(5415,7760) ; v2(5875,7480) C9:A21.1@5945.94,7480 ; v2(5950,4480) C9:A23.1@6020.94,4480 ; v2(5950,5980) C9:A22.1@6020.94,5980 ; C28:A11.2@6155,8335 v2(6195,8335) ; C28:A12.2@6213.46,4220 v2(6265,4220) ; C28:A13.2@6333.46,6900 v2(6390,6900) ; v2(6365,5620) C26:A13.1@6420.94,5620 ; v1(6395,9250) U3:A12.4@6395,9312.64 ; v1(6395,10755) U3:A11.4@6395,10817.64 ; v1(6400,12255) U3:A13.4@6400,12317.64 ; v2(7215,8020) C10:A21.1@7285.94,8020 ; v2(7290,5020) C10:A23.1@7360.94,5020 ; v2(7290,6520) C10:A22.1@7360.94,6520
  Top Layer w20: v1(5775.94,8990.94) v1(5775.94,9124.06) ; v1(5775.94,10490.94) v1(5775.94,10624.06) ; v1(5780.94,11999.06) v1(5780.94,12124.06) ; v1(10198.11,11198.11) C79.1@10240,11198.11 10261.89,11220 L2.2@10711,11220 ; C79.1@10240,11205 v1(10240,11300) ; v1(10700,11130) L2.2@10700,11220 ; L2.2@10705,11220 v1(10705,11330)
  Bottom Layer w10: C11:A21.2@6445,7785.21 6459.79,7800 v1(6480,7800) ; C11:A23.2@6520,4785.21 6534.79,4800 v1(6555,4800) ; C11:A22.2@6520,6285.21 6534.79,6300 v1(6555,6300) ; C12:A21.2@7125,7765.21 7139.79,7780 v1(7170,7780) ; C12:A23.2@7200,4765.21 7214.79,4780 v1(7245,4780) ; C12:A22.2@7200,6265.21 7214.79,6280 v1(7245,6280) ; v1(7405,8865) 7428.29,8841.71 C82.1@7460,8841.71 ; v1(7685,8340) 7701.71,8340 C90.1@7740,8301.71 ; C84.2@8080,8805.21 v1@8134.79,8805.21 ; v1(8260.32,7009.68) 8262.35,7011.71 C34:ADC2.1@8320,7011.71 ; v1(8260.32,9494.68) 8262.35,9496.71 C34:ADC1.1@8320,9496.71 ; C35:ADC2.2@8480,7055.21 v1(8524.79,7055.21) ; C35:ADC1.2@8480,9540.21 v1(8524.79,9540.21)
  Bottom Layer w16: C67:IN6.1@3381.72,4860 3414.72,4860 v1(3422.36,4852.36) ; C67:IN4.1@3381.72,6360 3414.72,6360 v1(3422.36,6352.36) ; C67:IN5.1@3381.72,7860 3414.72,7860 v1(3422.36,7852.36) ; C67:IN3.1@3381.72,9560 3414.72,9560 v1(3422.36,9552.36) ; C67:IN1.1@3381.72,11060 3414.72,11060 v1(3422.36,11052.36) ; C67:IN2.1@3381.72,12560 3414.72,12560 v1(3422.36,12552.36) ; C61:HF1.2@4020,10885.21 4045.21,10885.21 v1(4070,10910) ; C61:HF2.2@4030,6185.21 4055.21,6185.21 v1(4080,6210) ; C64:HFS2.2@4090,4714.79 v1(4129.79,4714.79) ; C64:HFS1.2@4100,9414.79 v1(4139.79,9414.79) ; v1(4116.72,12518.28) C56:H1.1@4180,12518.28 ; v1(4131.72,7818.28) C56:H2.1@4195,7818.29 ; JP7:H1.2@4760,12660 v1(4760,12710) ; JP7:H2.2@4775,7960 v1(4775,8010) ; C70:PGA2.1@4886.72,9544.58 v1(4908.15,9523.15) ; C70:PGA1.1@4946.72,11044.58 v1(4968.15,11023.15) ; C70:PGA5.1@5041.72,4844.58 v1(5063.15,4823.15) ; C70:PGA4.1@5041.72,6344.58 v1(5063.15,6323.15) ; C70:PGA3.1@5041.72,12544.58 v1(5063.15,12523.15) ; C70:PGA6.1@5071.72,7844.58 v1(5093.15,7823.15) ; v1(6395,9250) 6400.21,9255.21 C27:A12.2@6400.21,9295 ; v1(6395,10755) 6400.21,10760.21 C27:A11.2@6400.21,10800 ; v1(6400,12255) 6405.21,12260.21 C27:A13.2@6405.21,12300
  Bottom Layer w20: v1@10695,11125 v1(10700,11130)
AVSS: C13:A21.2 C13:A22.2 C13:A23.2 C14:A21.2 C14:A22.2 C14:A23.2 C15:A21.1 C15:A22.1 C15:A23.1 C16:A21.1 C16:A22.1 C16:A23.1 C29:A11.2 C29:A12.2 C29:A13.2 C30:A11.2 C30:A12.2 C30:A13.2 C31:A11.1 C31:A12.1 C31:A13.1 C32:A11.1 C32:A12.1 C32:A13.1 C59:H1.1 C59:H2.1 C62:HF1.2 C62:HF2.2 C65:HFS1.2 C65:HFS2.2 C68:IN1.2 C68:IN2.2 C68:IN3.2 C68:IN4.2 C68:IN5.2 C68:IN6.2 C69:IN1.1 C69:IN2.1 C69:IN3.1 C69:IN4.1 C69:IN5.1 C69:IN6.1 C72:PGA1.2 C72:PGA2.2 C72:PGA3.2 C72:PGA4.2 C72:PGA5.2 C72:PGA6.2 C73:PGA1.2 C73:PGA2.2 C73:PGA3.2 C73:PGA4.2 C73:PGA5.2 C73:PGA6.2 C80.2 C86.2 L3.2 U1:A21.4 U1:A22.4 U1:A23.4 U2:A21.4 U2:A22.4 U2:A23.4 U3:A11.11 U3:A12.11 U3:A13.11 U9:H1.4 U9:H2.4 U10:H1.7 U10:H2.7 U11:HF1.7 U11:HF2.7 U12:HF1.4 U12:HF2.4 U13:HFS1.4 U13:HFS2.4 U14:IN1.5 U14:IN2.5 U14:IN3.5 U14:IN4.5 U14:IN5.5 U14:IN6.5 U15:PGA1.4 U15:PGA2.4 U15:PGA3.4 U15:PGA4.4 U15:PGA5.4 U15:PGA6.4 U19.4 | length 5876.4
  Top Layer w10: U10:H1.7@4586.93,12454.41 4619.41,12454.41 v1(4625,12460) ; U10:H2.7@4601.93,7754.41 4634.41,7754.41 v1(4640,7760) ; U1:A21.4@6284.29,7720.31 6329.69,7720.31 v1(6345,7705) ; U1:A23.4@6359.29,4720.31 6404.69,4720.31 v1(6420,4705) ; U1:A22.4@6359.29,6220.31 6404.69,6220.31 v1(6420,6205) ; U2:A21.4@6964.29,7700.31 7004.69,7700.31 7020,7685 v1(7020,7665) ; U2:A23.4@7039.29,4700.31 7079.69,4700.31 7095,4685 v1(7095,4665) ; U2:A22.4@7039.29,6200.31 7079.69,6200.31 7095,6185 v1(7095,6165) ; v1(7890,8710) 7890,8713.31 U19.4@7918.31,8741.61 ; v1(10240,11625) C80.2@10240,11721.89
  Top Layer w16: C68:IN6.2@3370,4560 v1(3370,4625) 3410,4665 U14:IN6.5@3422.36,4665 ; C68:IN4.2@3370,6060 v1(3370,6125) 3410,6165 U14:IN4.5@3422.36,6165 ; C68:IN5.2@3370,7560 v1(3370,7625) 3410,7665 U14:IN5.5@3422.36,7665 ; C68:IN3.2@3370,9260 v1(3370,9325) 3410,9365 U14:IN3.5@3422.36,9365 ; C68:IN1.2@3370,10760 v1(3370,10825) 3410,10865 U14:IN1.5@3422.36,10865 ; C68:IN2.2@3370,12260 v1(3370,12325) 3410,12365 U14:IN2.5@3422.36,12365 ; U12:HF1.4@3784.84,10805 3785,10805 v1(3820,10770) ; U12:HF2.4@3794.84,6105 3795,6105 v1(3830,6070) ; U13:HFS2.4@3854.84,4625 3875,4625 v1(3900,4600) ; U13:HFS1.4@3864.84,9325 3885,9325 v1(3910,9300) ; U9:H1.4@3944.84,12425 3955,12425 v1(3985,12395) ; U9:H2.4@3959.84,7725 3970,7725 v1(4000,7695) ; v2(3999.06,7124.06) v2(3999.06,7265.94) ; U11:HF1.7@4446.93,10874.41 v1(4489.41,10874.41) ; U11:HF2.7@4456.93,6174.41 v1(4499.41,6174.41) ; C29:A12.2@4579.06,9620 v2(4645,9620) ; v1(4805,9395) U15:PGA2.4@4805,9423.23 ; C73:PGA2.2@4809.88,9320 v1@4809.88,9390.12 ; v1(4865,10895) U15:PGA1.4@4865,10923.23 ; C73:PGA1.2@4869.88,10820 v1@4869.88,10890.12 ; v1(4960,4695) U15:PGA5.4@4960,4723.23 ; v1(4960,6195) U15:PGA4.4@4960,6223.23 ; v1(4960,12395) U15:PGA3.4@4960,12423.23 ; C73:PGA5.2@4964.88,4620 v1@4964.88,4690.12 ; C73:PGA4.2@4964.88,6120 v1@4964.88,6190.12 ; C73:PGA3.2@4964.88,12320 v1@4964.88,12390.12 ; v1(4990,7695) U15:PGA6.4@4990,7723.23 ; C73:PGA6.2@4994.88,7620 v1@4994.88,7690.12 ; v2(5940,8020) C13:A21.2@6005.94,8020 ; v2(6015,5020) C13:A23.2@6080.94,5020 ; v2(6015,6520) C13:A22.2@6080.94,6520 ; v2(6215,6740) C32:A13.1@6266.54,6740 ; C29:A13.2@6350,7180 v2(6430,7180) ; v2(6365,4240) C32:A12.1@6426.54,4240 ; U3:A12.11@6395,9517.36 6395,9576.93 v1(6401.54,9583.46) ; U3:A11.11@6395,11022.36 6395,11081.93 v1(6401.54,11088.46) ; U3:A13.11@6400,12522.36 6400,12581.93 v1(6406.54,12588.46) ; v2(6495,5320) C32:A11.1@6546.54,5320 ; C14:A21.2@6685,7475 v2(6745,7475) ; C14:A23.2@6760,4475 v2(6820,4475) ; C14:A22.2@6760,5975 v2(6820,5975)
  Top Layer w20: v1(6250,12150) 6275,12175 v1(6380,12175) ; C30:A12.2@6310,9175 v1(6370,9175) ; C30:A11.2@6315,10679.06 v1(6379.06,10679.06) ; C80.2@10240,11721.89 10261.89,11700 L3.2@10711,11700 ; v1(10711,11609) v1(10711,11809)
  Bottom Layer w10: C15:A21.1@6285,7698.29 6291.71,7705 v1(6345,7705) ; C15:A23.1@6360,4698.29 6366.71,4705 v1(6420,4705) ; C15:A22.1@6360,6198.29 6366.71,6205 v1(6420,6205) ; v1(7890,8710) 7920,8680 C86.2@7934.79,8680
  Bottom Layer w16: C69:IN3.1@3310,9325 v1(3370,9325) 3403.28,9358.28 3420,9358.28 ; C69:IN1.1@3333.46,10800 3358.46,10825 v1(3370,10825) 3403.28,10858.28 3420,10858.28 ; v1(3370,4625) 3403.28,4658.28 3420,4658.28 ; v1(3370,6125) 3403.28,6158.28 3420,6158.28 ; v1(3370,7625) 3403.28,7658.28 C69:IN5.1@3420,7658.28 ; v1(3370,12325) 3403.28,12358.28 C69:IN2.1@3420,12358.28 ; C62:HF1.2@3780,10774.79 3784.79,10770 v1(3820,10770) ; C62:HF2.2@3790,6074.79 3794.79,6070 v1(3830,6070) ; C65:HFS2.2@3850,4614.79 3885.21,4614.79 v1(3900,4600) ; C65:HFS1.2@3860,9314.79 3895.21,9314.79 v1(3910,9300) ; C59:H1.1@3940,12418.28 3963.28,12395 v1(3985,12395) ; C59:H2.1@3955,7718.29 3978.28,7695 v1(4000,7695) ; v1(4805,9395) 4819.79,9380.21 C72:PGA2.2@4819.79,9360 ; v1(4865,10895) 4879.79,10880.21 C72:PGA1.2@4879.79,10860 ; v1(4960,4695) 4974.79,4680.21 C72:PGA5.2@4974.79,4660 ; v1(4960,6195) 4974.79,6180.21 C72:PGA4.2@4974.79,6160 ; v1(4960,12395) 4974.79,12380.21 C72:PGA3.2@4974.79,12360 ; v1(4990,7695) 5004.79,7680.21 C72:PGA6.2@5004.79,7660 ; C31:A12.1@6401.54,9535 v1(6401.54,9583.46) ; C31:A11.1@6401.54,11040 v1(6401.54,11088.46) ; C31:A13.1@6406.54,12540 v1(6406.54,12588.46)
FDIN: U6.48 U8.1 | length 338.7
  Top Layer w10: U6.48@10899.21,7596.85 11058.15,7596.85 v1(11080,7575) ; v1(11174.84,7575.16) U8.1@11228.78,7575.16
  Bottom Layer w10: v1(11080,7575) 11174.68,7575 v1(11174.84,7575.16)
FINIT_B: R37.1 U6.42 U8.8 | length 532.5
  Top Layer w10: U6.42@10899.21,7478.74 10951.26,7478.74 10990,7440 10990,7390 11020,7360 11150,7360 ; R37.1@11115,7265 11115,7325 11186.02,7396.02 U8.8@11228.78,7396.02
GND: C38.1 C39.2 C40.2 C41.2 C42.2 C43.2 C44.2 C45.2 C46.2 C47.2 C48.2 C49.2 C50.2 C51.2 C52.2 C53.2 C54.2 C74.2 C75.2 C76.2 C77.2 C78.2 JP6.1 JP6.3 JP6.5 JP6.7 JP6.9 JP6.11 JP6.13 L1.2 L1.4 O1.4 P1.1 P1.2 P1.19 P1.20 POWER-D1.1 POWER-D1.2 POWER-D1.3 U6.3 U6.10 U6.20 U6.24 U6.25 U6.26 U6.29 U6.41 U6.56 U6.66 U6.73 U6.82 U6.95 U7.9 U7.15 U8.11 U16.5 U16.6 U16.8 U16.P1 U16.P2 U16.P3 U16.P4 U16.P5 U16.P6 U16.P7 U16.P8 U16.P9 U16.P10 U16.P11 U16.p12 U16.p16 U16.p17 U17.1 U17.2 U17.8 | length 3085.6
  Top Layer w10: U7.9@9285.31,7765 v1(9345,7765) ; U7.15@9285.31,8065 v1(9350,8065) ; C77.2@10280,6660.94 v1(10344.06,6660.94) ; U6.95@10300.79,7262.2 10347.2,7262.2 v1(10375,7290) ; U6.82@10300.79,7518.11 10336.89,7518.11 v1(10380,7520) ; v1(10401.54,7646.54) 10403.15,7648.15 U6.73@10403.15,7699.21 ; U6.3@10403.15,7100.79 v1(10403.15,7173.15) ; U17.8@10477.64,6645 v1(10550,6645) ; U6.10@10540.94,7100.79 v1(10540.94,7155.94) ; U6.66@10540.94,7699.21 10540.94,7654.06 v1(10555,7640) ; v1(10625,7960) C78.2@10680.94,7960 v1(10680.94,7900.94) ; v1(10675,8580) C74.2@10785,8580 ; C78.2@10680,7960 v1(10680,8020) ; U17.1@10682.36,6645 10735,6645 v1(10760,6670) 10735,6695 U17.2@10682.36,6695 ; v1(10710,7630) 10737.8,7657.8 U6.56@10737.8,7699.21 ; v1(10725,7160) 10730,7160 10737.8,7152.2 U6.20@10737.8,7100.79 ; v1(10781.89,8543.11) C74.2@10781.89,8580 ; U6.24@10816.54,7100.79 v1(10816.54,7153.46) ; U16.p12@10835.8,8245.8 10835.8,8355.8 10850,8370 v1(10900,8370) 10912.6,8357.4 U16.5@10912.6,8315 ; v1(10836.22,7043.78) U6.25@10836.22,7100.79 ; v1(10840,7205) 10857.83,7222.83 U6.29@10899.21,7222.83 ; v1(10840.94,7459.06) U6.41@10899.21,7459.06 ; U16.p12@10887,8243 10887,8357 ; v1(10899.21,7140.79) U6.26@10899.21,7163.78 ; v1(11090,6590) 11120,6560 O1.4@11140,6560 ; v1(11119.06,7890.94) C75.2@11119.06,7960 v1(11190,7960) ; U8.11@11451.22,7344.84 v1(11504.84,7344.84)
  Bottom Layer w10: C38.1@9280,8058.29 9343.29,8058.29 v1(9350,8065) ; v1(10205,7485) 10230,7460 C52.2@10250,7459.06 ; 10266.54,7440 C52.2@10266.54,7443.46 ; C40.2@10345.21,7520 v1(10380,7520) v1@10380,7530.21 ; C41.2@10353.46,7260 10375,7281.54 v1(10375,7290) ; C48.2@10353.46,7340 v1(10400,7340) ; v1(10401.54,7646.54) C47.2@10440,7646.54 ; v1(10403.15,7173.15) 10422.83,7153.47 C42.2@10422.83,7134.25 ; C51.2@10520,7646.54 10526.54,7640 v1(10555,7640) ; v1(10540.94,7155.94) 10553.46,7143.42 C53.2@10553.46,7100 ; C76.2@10680,6654.79 10744.79,6654.79 v1(10760,6670) ; C50.2@10680,7145.21 v1(10680,7195) ; v1(10710,7630) 10715.21,7630 C46.2@10740,7654.79 ; v1(10725,7160) 10739.79,7145.21 C43.2@10760,7145.21 ; v1(10825,7600) C45.2@10866.54,7600 ; v1(10840,7205) 10840,7225.21 C44.2@10854.79,7240 ; v1(10840.94,7459.06) 10854.79,7472.9 C49.2@10854.79,7500 ; C54.2@10933.46,7320 v1(10975,7320) ; v1(11090,6590) C39.2@11090,6655.21
NetC1:A21_1: C1:A21.1 R1:A21.1 R7:A21.1 U1:A21.1 | length 524.5
  Top Layer w10: R1:A21.1@6018.46,7860 6035,7860 6075,7900 6158.46,7900 C1:A21.1@6198.46,7860 ; U1:A21.1@6284.29,7779.37 6240.63,7779.37 6198.46,7821.54 C1:A21.1@6198.46,7860 ; R7:A21.1@6351.54,7900 6238.46,7900 C1:A21.1@6198.46,7860
NetC1:A21_2: C1:A21.2 R6:A21.2 U1:A21.2 | length 256.4
  Top Layer w10: C1:A21.2@6131.54,7860 6131.54,7833.46 6205.32,7759.68 U1:A21.2@6284.29,7759.68 ; R6:A21.2@6178.46,7740 6178.46,7786.54
NetC1:A22_1: C1:A22.1 R1:A22.1 R7:A22.1 U1:A22.1 | length 524.5
  Top Layer w10: R1:A22.1@6093.46,6360 6110,6360 6150,6400 6233.46,6400 C1:A22.1@6273.46,6360 ; U1:A22.1@6359.29,6279.37 6315.63,6279.37 6273.46,6321.54 C1:A22.1@6273.46,6360 ; R7:A22.1@6426.54,6400 6313.46,6400 C1:A22.1@6273.46,6360
NetC1:A22_2: C1:A22.2 R6:A22.2 U1:A22.2 | length 256.4
  Top Layer w10: C1:A22.2@6206.54,6360 6206.54,6333.46 6280.32,6259.68 U1:A22.2@6359.29,6259.68 ; R6:A22.2@6253.46,6240 6253.46,6286.54
NetC1:A23_1: C1:A23.1 R1:A23.1 R7:A23.1 U1:A23.1 | length 524.5
  Top Layer w10: R1:A23.1@6093.46,4860 6110,4860 6150,4900 6233.46,4900 C1:A23.1@6273.46,4860 ; U1:A23.1@6359.29,4779.37 6315.63,4779.37 6273.46,4821.54 C1:A23.1@6273.46,4860 ; R7:A23.1@6426.54,4900 6313.46,4900 C1:A23.1@6273.46,4860
NetC1:A23_2: C1:A23.2 R6:A23.2 U1:A23.2 | length 256.4
  Top Layer w10: C1:A23.2@6206.54,4860 6206.54,4833.46 6280.32,4759.68 U1:A23.2@6359.29,4759.68 ; R6:A23.2@6253.46,4740 6253.46,4786.54
NetC2:A21_1: C2:A21.1 R2:A21.1 R9:A21.1 U1:A21.9 | length 425.9
  Top Layer w10: U1:A21.9@6445.71,7759.68 R2:A21.1@6538.15,7759.68 ; R2:A21.1@6545,7766.54 6578.46,7733.07 C2:A21.1@6578.46,7640 R9:A21.1@6771.54,7640
NetC2:A21_2: C2:A21.2 R8:A21.2 U1:A21.8 | length 386.8
  Top Layer w10: R8:A21.2@6485,7866.54 6461.54,7866.54 6385,7790 6385,7760 6405,7740 6495,7740 6511.54,7723.46 C2:A21.2@6511.54,7640
NetC2:A22_1: C2:A22.1 R2:A22.1 R9:A22.1 U1:A22.9 | length 425.9
  Top Layer w10: U1:A22.9@6520.71,6259.68 R2:A22.1@6613.15,6259.68 ; R2:A22.1@6620,6266.54 6653.46,6233.07 C2:A22.1@6653.46,6140 R9:A22.1@6846.54,6140
NetC2:A22_2: C2:A22.2 R8:A22.2 U1:A22.8 | length 386.8
  Top Layer w10: R8:A22.2@6560,6366.54 6536.54,6366.54 6460,6290 6460,6260 6480,6240 6570,6240 6586.54,6223.46 C2:A22.2@6586.54,6140
NetC2:A23_1: C2:A23.1 R2:A23.1 R9:A23.1 U1:A23.9 | length 425.9
  Top Layer w10: U1:A23.9@6520.71,4759.68 R2:A23.1@6613.15,4759.68 ; R2:A23.1@6620,4766.54 6653.46,4733.07 C2:A23.1@6653.46,4640 R9:A23.1@6846.54,4640
NetC2:A23_2: C2:A23.2 R8:A23.2 U1:A23.8 | length 386.8
  Top Layer w10: R8:A23.2@6560,4866.54 6536.54,4866.54 6460,4790 6460,4760 6480,4740 6570,4740 6586.54,4723.46 C2:A23.2@6586.54,4640
NetC3:A21_1: C3:A21.1 R3:A21.1 R11:A21.1 U2:A21.1 | length 325.5
  Top Layer w10: R3:A21.1@6918.46,7940 R11:A21.1@7035,7940 ; R3:A21.1@6920,7950 6920,7871.54 6964.29,7827.24 U2:A21.1@6964.29,7759.37
NetC3:A21_2: C3:A21.2 R10:A21.2 U2:A21.2 | length 285.8
  Top Layer w10: R10:A21.2@6838.46,7720 6875,7720 6894.68,7739.68 7004.68,7739.68 7025,7760 7025,7833.46 C3:A21.2@7018.46,7840
NetC3:A22_1: C3:A22.1 R3:A22.1 R11:A22.1 U2:A22.1 | length 325.5
  Top Layer w10: R3:A22.1@6993.46,6440 R11:A22.1@7110,6440 ; R3:A22.1@6995,6450 6995,6371.54 7039.29,6327.24 U2:A22.1@7039.29,6259.37
NetC3:A22_2: C3:A22.2 R10:A22.2 U2:A22.2 | length 285.8
  Top Layer w10: R10:A22.2@6913.46,6220 6950,6220 6969.68,6239.68 7079.68,6239.68 7100,6260 7100,6333.46 C3:A22.2@7093.46,6340
NetC3:A23_1: C3:A23.1 R3:A23.1 R11:A23.1 U2:A23.1 | length 325.5
  Top Layer w10: R3:A23.1@6993.46,4940 R11:A23.1@7110,4940 ; R3:A23.1@6995,4950 6995,4871.54 7039.29,4827.24 U2:A23.1@7039.29,4759.37
NetC3:A23_2: C3:A23.2 R10:A23.2 U2:A23.2 | length 285.8
  Top Layer w10: R10:A23.2@6913.46,4720 6950,4720 6969.68,4739.68 7079.68,4739.68 7100,4760 7100,4833.46 C3:A23.2@7093.46,4840
NetC4:A21_1: C4:A21.1 J17.1 R4:A21.1 R49.1 U2:A21.9 | length 1902.9
  Top Layer w10: U2:A21.9@7125.71,7739.68 7199.68,7739.68 7206.54,7746.54 R4:A21.1@7245,7746.54 7278.46,7713.07 C4:A21.1@7278.46,7640
  Top Layer w16: J17.1@7180,7020 7185,7025 7360,7025 7540,7205 7540,7770 ; C4:A21.1@7270,7640 7365,7640 7495,7770 R49.1@7874.88,7770
NetC4:A21_2: C4:A21.2 R12:A21.2 U2:A21.8 | length 426.8
  Top Layer w10: R12:A21.2@7185,7846.54 7131.54,7846.54 7055,7770 7055,7730 7065,7720 7185,7720 7211.54,7693.46 C4:A21.2@7211.54,7640
NetC4:A22_1: C4:A22.1 J22.1 R4:A22.1 R50.1 U2:A22.9 | length 2007.7
  Top Layer w10: U2:A22.9@7200.71,6239.68 7274.68,6239.68 7281.54,6246.54 R4:A22.1@7320,6246.54 7353.46,6213.07 C4:A22.1@7353.46,6140
  Top Layer w16: J22.1@7240,5500 7245,5505 7435,5505 7630,5700 7630,6335 ; C4:A22.1@7353.46,6140 7435,6140 7630,6335 ; R50.1@7930,6335 7630,6335
NetC4:A22_2: C4:A22.2 R12:A22.2 U2:A22.8 | length 426.8
  Top Layer w10: R12:A22.2@7260,6346.54 7206.54,6346.54 7130,6270 7130,6230 7140,6220 7260,6220 7286.54,6193.46 C4:A22.2@7286.54,6140
NetC4:A23_1: C4:A23.1 J27.1 R4:A23.1 R52.1 U2:A23.9 | length 2216.1
  Top Layer w10: U2:A23.9@7200.71,4739.68 7274.68,4739.68 7281.54,4746.54 R4:A23.1@7320,4746.54 7353.46,4713.07 C4:A23.1@7353.46,4640
  Top Layer w16: C4:A23.1@7353.46,4640 7430,4640 7605,4815 ; J27.1@7360,3800 7360,4090 7690,4420 7690,4730 7605,4815 ; R52.1@7915,5120 7865,5120 7605,4860 7605,4815
NetC4:A23_2: C4:A23.2 R12:A23.2 U2:A23.8 | length 426.8
  Top Layer w10: R12:A23.2@7260,4846.54 7206.54,4846.54 7130,4770 7130,4730 7140,4720 7260,4720 7286.54,4693.46 C4:A23.2@7286.54,4640
NetC5:A21_2: C5:A21.2 R1:A21.2 R5:A21.2 R6:A21.1 | length 364.7
  Top Layer w16: R1:A21.2@5951.54,7860 5978.46,7833.07 R5:A21.2@5978.46,7740 R6:A21.1@6111.54,7740 6050,7678.46 C5:A21.2@6050,7665
NetC5:A22_2: C5:A22.2 R1:A22.2 R5:A22.2 R6:A22.1 | length 364.7
  Top Layer w16: R1:A22.2@6026.54,6360 6053.46,6333.07 R5:A22.2@6053.46,6240 R6:A22.1@6186.54,6240 6125,6178.46 C5:A22.2@6125,6165
NetC5:A23_2: C5:A23.2 R1:A23.2 R5:A23.2 R6:A23.1 | length 364.7
  Top Layer w16: R1:A23.2@6026.54,4860 6053.46,4833.07 R5:A23.2@6053.46,4740 R6:A23.1@6186.54,4740 6125,4678.46 C5:A23.2@6125,4665
NetC6:A21_2: C6:A21.2 R2:A21.2 R7:A21.2 R8:A21.1 | length 349.5
  Top Layer w10: R7:A21.2@6398.46,7900 6415,7900 6448.46,7933.46 6498.07,7933.46 6545,7886.54 R2:A21.2@6545,7833.46 6585,7793.46 C6:A21.2@6645,7793.46
NetC6:A22_2: C6:A22.2 R2:A22.2 R7:A22.2 R8:A22.1 | length 349.5
  Top Layer w10: R7:A22.2@6473.46,6400 6490,6400 6523.46,6433.46 6573.07,6433.46 6620,6386.54 R2:A22.2@6620,6333.46 6660,6293.46 C6:A22.2@6720,6293.46
NetC6:A23_2: C6:A23.2 R2:A23.2 R7:A23.2 R8:A23.1 | length 349.5
  Top Layer w10: R7:A23.2@6473.46,4900 6490,4900 6523.46,4933.46 6573.07,4933.46 6620,4886.54 R2:A23.2@6620,4833.46 6660,4793.46 C6:A23.2@6720,4793.46
NetC7:A21_2: C7:A21.2 R3:A21.2 R9:A21.2 R10:A21.1 | length 362.1
  Top Layer w10: R9:A21.2@6838.46,7640 6838.46,7653.07 6770,7721.54 6770,7735 6838.46,7803.46 6838.46,7926.93 R3:A21.2@6851.54,7940
NetC7:A22_2: C7:A22.2 R3:A22.2 R9:A22.2 R10:A22.1 | length 362.1
  Top Layer w10: R9:A22.2@6913.46,6140 6913.46,6153.07 6845,6221.54 6845,6235 6913.46,6303.46 6913.46,6426.93 R3:A22.2@6926.54,6440
NetC7:A23_2: C7:A23.2 R3:A23.2 R9:A23.2 R10:A23.1 | length 362.1
  Top Layer w10: R9:A23.2@6913.46,4640 6913.46,4653.07 6845,4721.54 6845,4735 6913.46,4803.46 6913.46,4926.93 R3:A23.2@6926.54,4940
NetC8:A21_2: C8:A21.2 R4:A21.2 R11:A21.2 R12:A21.1 | length 342.9
  Top Layer w10: R11:A21.2@7098.46,7940 7158.46,7940 7245,7853.46 7245,7805 7250,7810 C8:A21.2@7355,7810
NetC8:A22_2: C8:A22.2 R4:A22.2 R11:A22.2 R12:A22.1 | length 342.9
  Top Layer w10: R11:A22.2@7173.46,6440 7233.46,6440 7320,6353.46 7320,6305 7325,6310 C8:A22.2@7430,6310
NetC8:A23_2: C8:A23.2 R4:A23.2 R11:A23.2 R12:A23.1 | length 342.9
  Top Layer w10: R11:A23.2@7173.46,4940 7233.46,4940 7320,4853.46 7320,4805 7325,4810 C8:A23.2@7430,4810
NetC17:A11_1: C17:A11.1 R13:A11.1 R19:A11.1 U3:A11.1 | length 748.6
  Top Layer w16: R13:A11.1@6088.46,10660 6190,10660 6240,10710 6235,10710 ; C17:A11.1@6088.46,10780 6165,10780 6235,10710 ; v1(6128.46,10956.54) R19:A11.1@6128.46,11020 ; 6135,10780 v1(6170,10815) ; U3:A11.1@6245,10830 6245,10720 6235,10710
  Bottom Layer w16: v1(6128.46,10956.54) 6170,10915 v1(6170,10815)
NetC17:A11_2: C17:A11.2 R18:A11.2 U3:A11.2 | length 401.7
  Top Layer w16: C17:A11.2@6020,10790 6020,10825 6090,10895 6270,10895 6295,10870 U3:A11.2@6295,10817.64
NetC17:A12_1: C17:A12.1 R13:A12.1 R19:A12.1 U3:A12.1 | length 748.6
  Top Layer w16: R13:A12.1@6088.46,9155 6190,9155 6240,9205 6235,9205 ; C17:A12.1@6088.46,9275 6165,9275 6235,9205 ; v1(6128.46,9451.54) R19:A12.1@6128.46,9515 ; 6135,9275 v1(6170,9310) ; U3:A12.1@6245,9325 6245,9215 6235,9205
  Bottom Layer w16: v1(6128.46,9451.54) 6170,9410 v1(6170,9310)
NetC17:A12_2: C17:A12.2 R18:A12.2 U3:A12.2 | length 401.7
  Top Layer w16: C17:A12.2@6020,9285 6020,9320 6090,9390 6270,9390 6295,9365 U3:A12.2@6295,9312.64
NetC17:A13_1: C17:A13.1 R13:A13.1 R19:A13.1 U3:A13.1 | length 748.6
  Top Layer w16: R13:A13.1@6093.46,12160 6195,12160 6245,12210 6240,12210 ; C17:A13.1@6093.46,12280 6170,12280 6240,12210 ; v1(6133.46,12456.54) R19:A13.1@6133.46,12520 ; 6140,12280 v1(6175,12315) ; U3:A13.1@6250,12330 6250,12220 6240,12210
  Bottom Layer w16: v1(6133.46,12456.54) 6175,12415 v1(6175,12315)
NetC17:A13_2: C17:A13.2 R18:A13.2 U3:A13.2 | length 401.7
  Top Layer w16: C17:A13.2@6025,12290 6025,12325 6095,12395 6275,12395 6300,12370 U3:A13.2@6300,12317.64
NetC18:A11_1: C18:A11.1 R14:A11.1 R21:A11.1 U3:A11.14 | length 489.9
  Top Layer w16: R14:A11.1@6168.46,11220 6205,11220 6245,11180 U3:A11.14@6245,11022.36 ; 6245,11163.46 C18:A11.1@6295,11213.46 ; C18:A11.1@6286.54,11213.46 R21:A11.1@6455,11213.46
NetC18:A11_2: C18:A11.2 R20:A11.2 U3:A11.13 | length 474.9
  Top Layer w16: R20:A11.2@6165,11120 6165,11095 6200,11060 6200,10965 6215,10950 6285,10950 6295,10960 C18:A11.2@6295,11160